# Altium PCB keyboard.pcbdoc
Units mil, origin at the board's own origin, x right, y up, seen from the top; angles counter-clockwise.
Board outline 4326.77 x 4055.12 mil, 2 copper layers (Top Layer, Bottom Layer); 11 components, 12 nets, 89 pads, 0 vias.
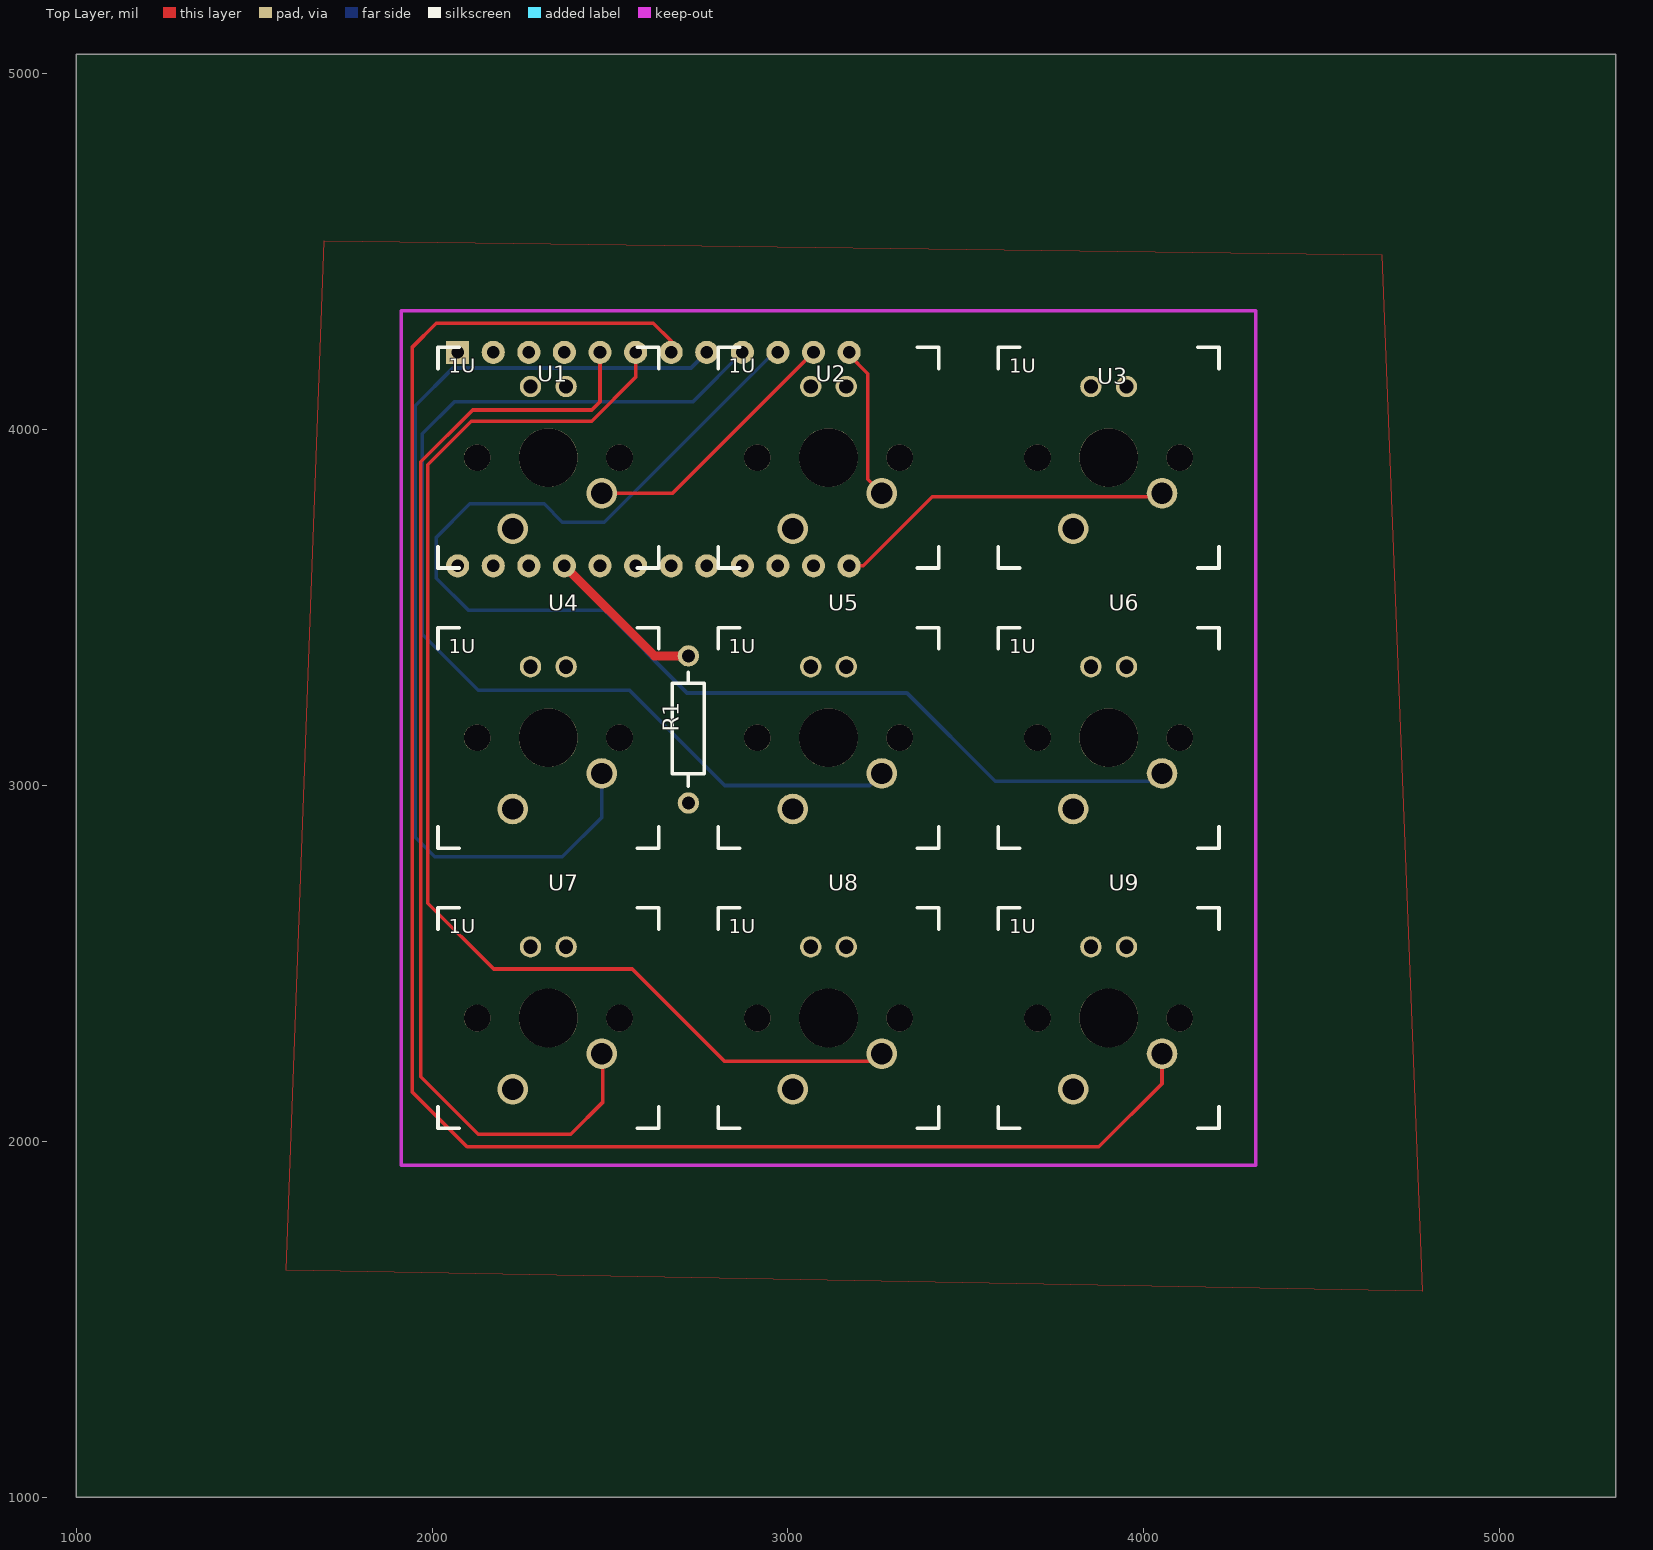
[diagram p0: Top Layer view]
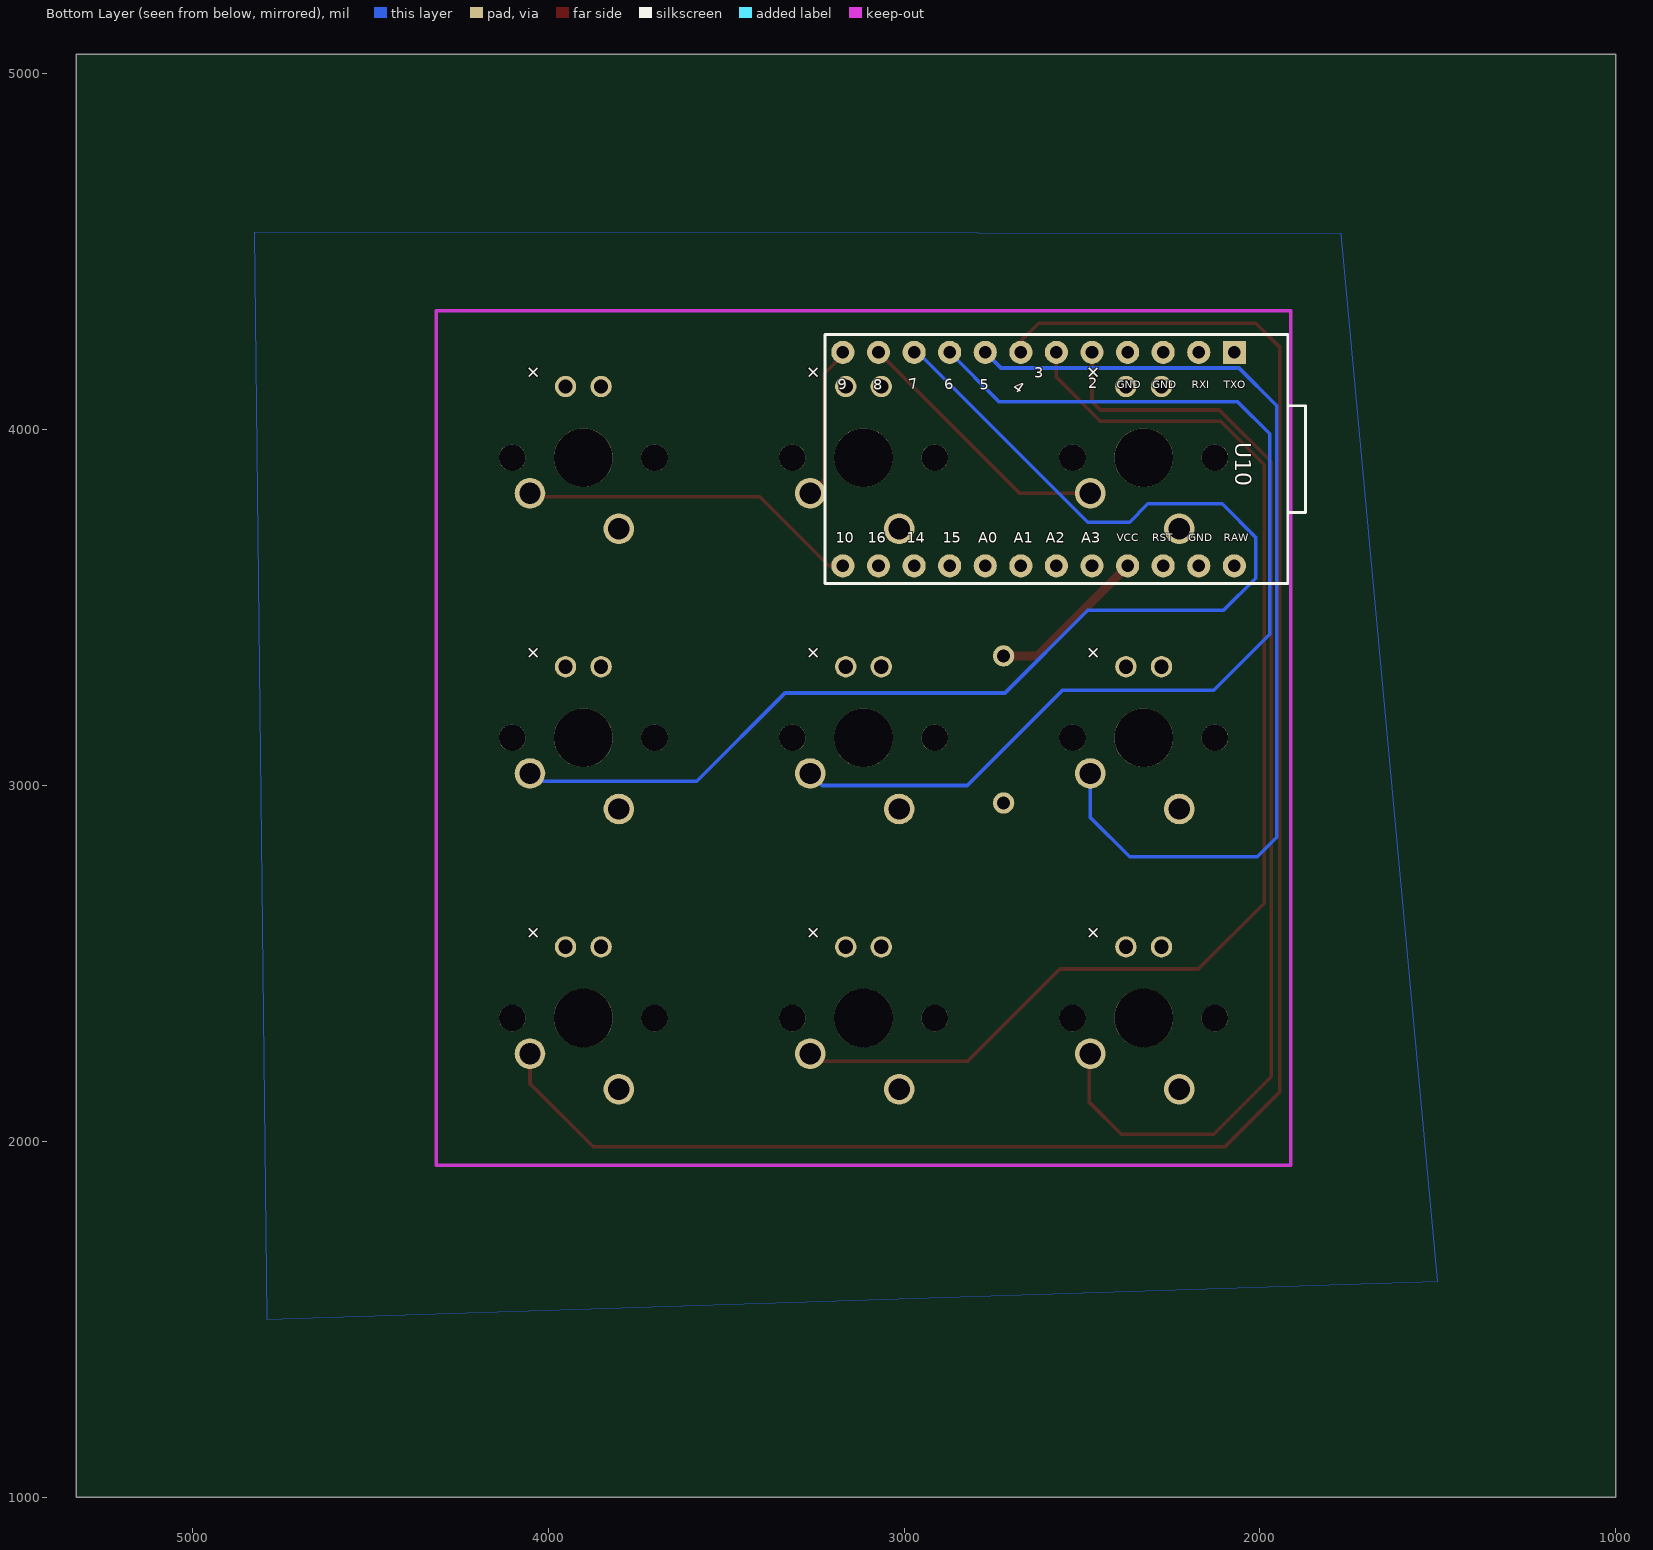
[diagram p1: Bottom Layer view, seen from below]

## Layer stack, top to bottom
Top Layer: signal copper (thickness not stored)
Dielectric: dielectric 12.6, FR-4, Dk 4.8
Bottom Layer: signal copper (thickness not stored)

## Board outline
5326.77,1000 1000,1000 1000,5055.12 5326.77,5055.12

## Components (designator, comment, footprint, x,y, rotation, side; value= is the part's Value field where it differs from the comment)
R1 "500R" RES-TH_BD2.2-L6.5-P10.50-D0.6 2720.47,3157.48 r90 top
U1 "MX-1U" CHERRY_MX_1U 2326.77,3921.26 r0 top
U2 "MX-1U" CHERRY_MX_1U 3114.17,3921.26 r0 top
U3 "MX-1U" CHERRY_MX_1U 3901.58,3921.26 r0 top
U4 "MX-1U" CHERRY_MX_1U 2326.77,3133.86 r0 top
U5 "MX-1U" CHERRY_MX_1U 3114.17,3133.86 r0 top
U6 "MX-1U" CHERRY_MX_1U 3901.58,3133.86 r0 top
U7 "MX-1U" CHERRY_MX_1U 2326.77,2346.46 r0 top
U8 "MX-1U" CHERRY_MX_1U 3114.17,2346.46 r0 top
U9 "MX-1U" CHERRY_MX_1U 3901.58,2346.46 r0 top
U10 "ARDUINO_PRO_MICRO COPY" ARDUINO_PRO_MICRO 2622.05,3917.32 r90 bottom

## Footprints (in the part's own frame and the unit in brackets; to place one, negate y for a bottom-side part, rotate by r counter-clockwise, add the part's x,y. Pads: shape width x height; smd on the part's side, far side on the other; paste and mask are expansions set on the pad)
ARDUINO_PRO_MICRO [mil]
  rect 65x65 hole 35.43: 1(300,-550)
  round 65 hole 35.43: 2(300,-450) 3(300,-350) 4(300,-250) 5(300,-150) 6(300,-50) 7(300,50) 8(300,150) 9(300,250) 10(300,350) 11(300,450) 12(300,550) 13(-300,550) 14(-300,450) 15(-300,350) 16(-300,250) 17(-300,150) 18(-300,50) 19(-300,-50) 20(-300,-150) 21(-300,-250) 22(-300,-350) 23(-300,-450) 24(-300,-550)
  silkscreen extent -350,-750 350,600
CHERRY_MX_1U [mil]
  round 86 hole 60: COL(150,-100) ROW(-100,-200)
  round 60 hole 40: LED(50,200) LEDGND(-50,200)
  round 75 hole 75 unplated: ""(-200,0) ""(200,0)
  round 165 hole 165 unplated: ""(0,0)
  silkscreen extent -310,-310 310,310
RES-TH_BD2.2-L6.5-P10.50-D0.6 [mil]
  round 60 hole 36: 1(-206.69,0) 2(206.69,0)
  silkscreen extent -160,-45 160,45

## Nets (pads, with @x,y where several pads share a name; then routed paths per layer and width w, separated by ;. In a path a pad name is that pad's centre, name@x,y a point inside that pad or via, vN(x,y) a via of type N, cw(c..) or ccw(c..) an arc to the next point about the centre after c; other vN are vias at no path point)
+5V: R1.2 U10.21 | length 453.3
  Top Layer w25: U10.21 2625.19,3364.18 R1.2
GND: U1.LEDGND U1.ROW U2.LEDGND U2.ROW U3.LEDGND U3.ROW U4.LEDGND U4.ROW U5.LEDGND U5.ROW U6.LEDGND U6.ROW U7.LEDGND U7.ROW U8.LEDGND U8.ROW U9.LEDGND U9.ROW U10.3 U10.4 U10.23
LED: R1.1 U1.LED U2.LED U3.LED U4.LED U5.LED U6.LED U7.LED U8.LED U9.LED
M1: U7.COL U10.5 | length 3194.8
  Top Layer w10: U10.5@2472.03,4217.35 2472.03,4078.35 2448.82,4055.15 2114.12,4055.15 1968.53,3909.45 1968.53,2181.05 2129.93,2019.65 2389.72,2019.65 2480.32,2110.25 2480.32,2242.95 U7.COL@2476.72,2246.45
M2: U8.COL U10.6 | length 3457.5
  Top Layer w10: U10.6@2572.03,4217.35 2572.03,4146.85 2448.82,4023.65 2110.22,4023.65 1988.22,3901.55 1988.22,2669.25 2173.22,2484.25 2563.03,2484.25 2822.82,2224.45 3242.12,2224.45 U8.COL@3264.12,2246.45
M3: U9.COL U10.7 | length 5230.4
  Top Layer w10: U10.7@2672.03,4217.35 2672.03,4249.25 2622.03,4299.25 2011.83,4299.25 1944.92,4232.25 1944.92,2137.75 2098.43,1984.25 3874.03,1984.25 4051.53,2161.85 U9.COL@4051.53,2246.45
M4: U4.COL U10.8 | length 2810.8
  Bottom Layer w10: U4.COL@2476.72,3033.85 2476.72,2909.85 2366.12,2799.25 2007.83,2799.25 1952.72,2854.35 1952.72,4066.95 2059.03,4173.25 2727.93,4173.25 U10.8@2772.03,4217.35
M5: U5.COL U10.9 | length 3039.4
  Bottom Layer w10: U10.9 2733.47,4078.74 2062.99,4078.74 1972.44,3988.19 1972.44,3425.2 2129.92,3267.72 2555.12,3267.72 2822.84,3000 3230.32,3000 U5.COL
M6: U6.COL U10.10 | length 3617.6
  Bottom Layer w10: U10.10@2972.03,4217.35 2961.43,4217.35 2484.22,3740.15 2366.12,3740.15 2314.93,3791.35 2106.32,3791.35 2011.83,3696.85 2011.83,3582.65 2102.32,3492.15 2484.22,3492.15 2716.53,3259.85 3334.62,3259.85 3582.72,3011.85 4029.53,3011.85 U6.COL@4051.53,3033.85
M7: U1.COL U10.11 | length 759.3
  Top Layer w10: U1.COL 2675.99,3821.26 U10.11
M8: U2.COL U10.12 | length 434.2
  Top Layer w10: U10.12 3172.05,4209.84 3224.41,4157.48 3224.41,3861.03 U2.COL
M9: U3.COL U10.13 | length 969.9
  Top Layer w10: U10.13@3172.03,3617.35 3211.82,3617.35 3405.53,3811.05 4051.53,3811.05 U3.COL@4051.53,3821.25
pads on no net: U1. U2. U3. U4. U5. U6. U7. U8. U9. U10.1 U10.2 U10.14 U10.15 U10.16 U10.17 U10.18 U10.19 U10.20 U10.22 U10.24

## Polygon pours and split planes (outlines as drawn)
GND on Bottom Layer (solid): 1771.65,4551.18 4826.77,4555.12 4791.34,1500 1500,1606.3
LED on Top Layer (solid): 1696.85,4531.5 4669.29,4492.13 4783.47,1578.74 1590.55,1637.8

## Text inside footprints (layer, text, board x,y; h text height)
U1: Bottom Overlay "+" at 2463.65,4189.05 h40 r135; Top Overlay "1U" at 2046.78,4159.46 h40
U2: Bottom Overlay "+" at 3251.05,4189.05 h40 r135; Top Overlay "1U" at 2834.18,4159.46 h40
U3: Bottom Overlay "+" at 4038.45,4189.05 h40 r135; Top Overlay "1U" at 3621.57,4159.46 h40
U4: Bottom Overlay "+" at 2463.65,3401.65 h40 r135; Top Overlay "1U" at 2046.78,3372.06 h40
U5: Bottom Overlay "+" at 3251.05,3401.65 h40 r135; Top Overlay "1U" at 2834.18,3372.06 h40
U6: Bottom Overlay "+" at 4038.45,3401.65 h40 r135; Top Overlay "1U" at 3621.57,3372.06 h40
U7: Bottom Overlay "+" at 2463.65,2614.24 h40 r135; Top Overlay "1U" at 2046.78,2584.65 h40
U8: Bottom Overlay "+" at 3251.05,2614.24 h40 r135; Top Overlay "1U" at 2834.18,2584.65 h40
U9: Bottom Overlay "+" at 4038.45,2614.24 h40 r135; Top Overlay "1U" at 3621.57,2584.65 h40
U10: Bottom Overlay "9" at 3185.74,4112.38 h30 r355; Bottom Overlay "8" at 3087.05,4112.32 h30; Bottom Overlay "7" at 2984.18,4112.6 h30 r349; Bottom Overlay "6" at 2885.74,4112.38 h30 r355; Bottom Overlay "5" at 2787.05,4112.32 h30; Bottom Overlay "4" at 2695.65,4115.04 h30 r35; Bottom Overlay "3" at 2633.86,4146.41 h30; Bottom Overlay "2" at 2482.05,4116.42 h30; Bottom Overlay "GND" at 2402.05,4116.32 h22; Bottom Overlay "GND" at 2302.05,4116.32 h22; Bottom Overlay "RXI" at 2192.05,4116.32 h22; Bottom Overlay "TXO" at 2102.05,4116.32 h22; Bottom Overlay "RAW" at 2102.05,3686.32 h22; Bottom Overlay "GND" at 2202.05,3686.32 h22; Bottom Overlay "RST" at 2302.05,3686.32 h22; Bottom Overlay "VCC" at 2402.05,3686.32 h22; Bottom Overlay "A3" at 2502.05,3682.32 h30; Bottom Overlay "A2" at 2602.05,3682.32 h30; Bottom Overlay "A1" at 2692.05,3682.32 h30; Bottom Overlay "A0" at 2792.05,3682.32 h30; Bottom Overlay "15" at 2892.05,3682.32 h30; Bottom Overlay "14" at 2992.05,3682.32 h30; Bottom Overlay "16" at 3102.05,3682.32 h30; Bottom Overlay "10" at 3192.05,3682.32 h30